# Altium PCB Hexrotor Joint Splitter.PcbDoc
Units mm, origin at the board's own origin, x right, y up, seen from the top; angles counter-clockwise.
Board outline 24.77 x 16.64 mm, 2 copper layers (Top Layer, Bottom Layer); 2 components, 5 nets, 19 pads, 2 vias.
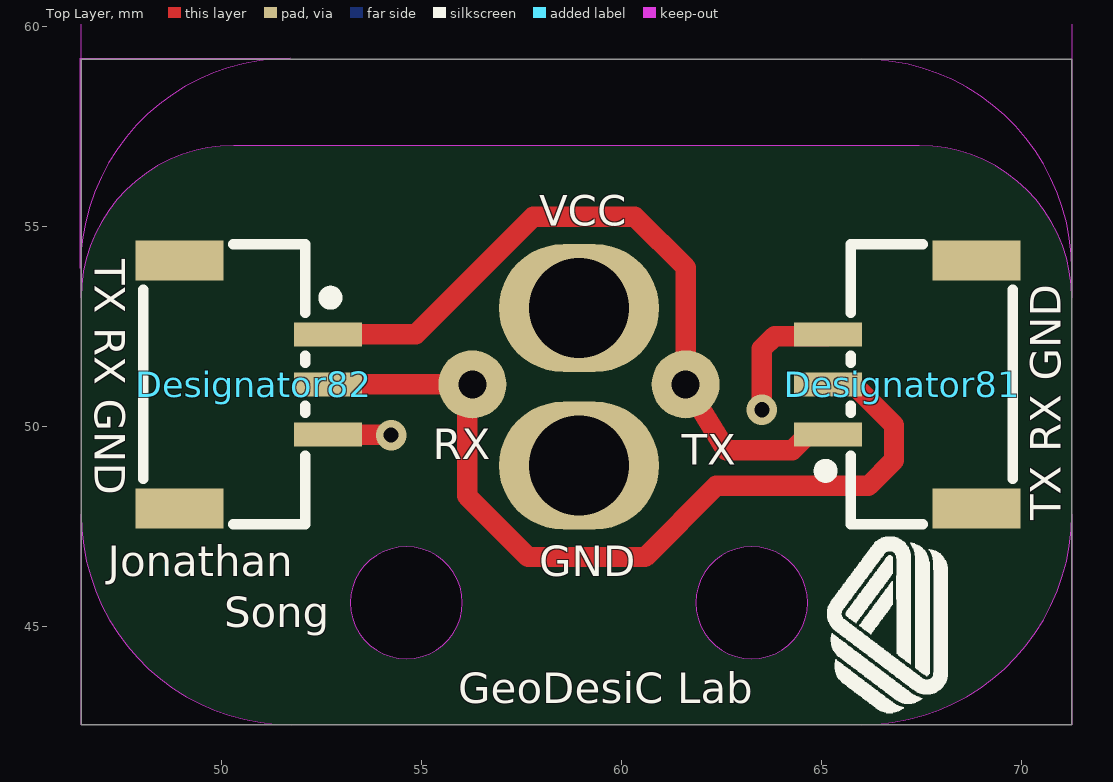
[diagram p0: Top Layer view]
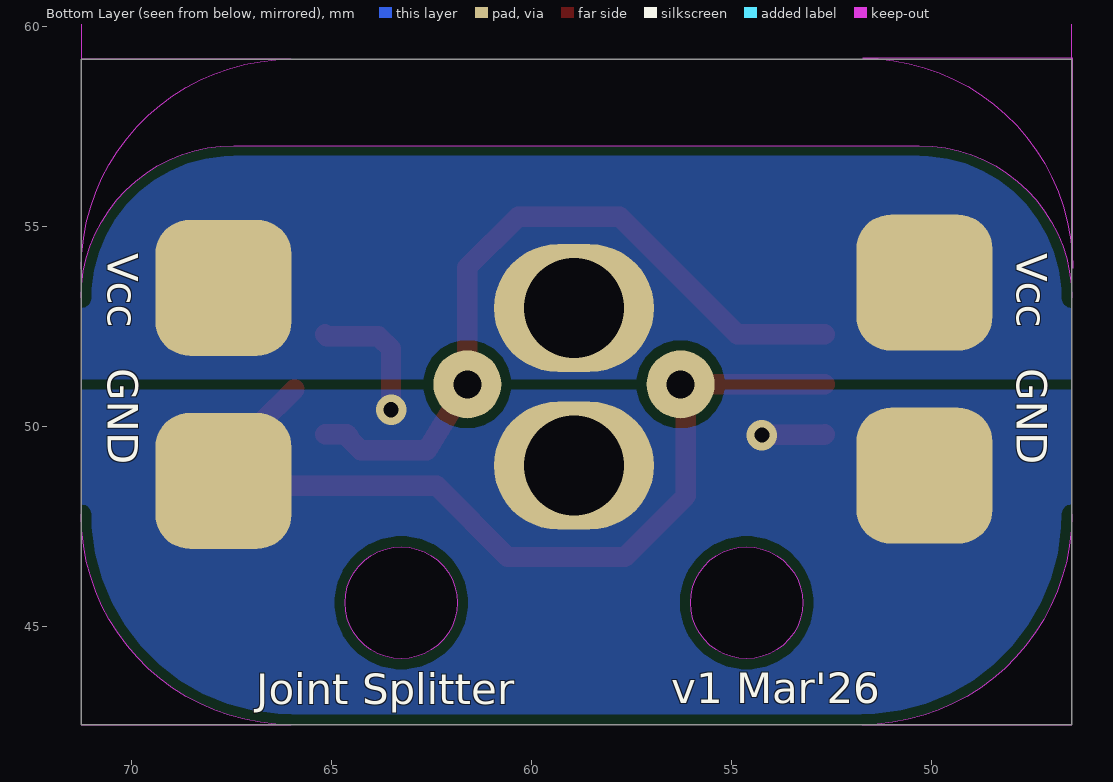
[diagram p1: Bottom Layer view, seen from below]

## Layer stack, top to bottom
Top Solder: solder mask 0.0102, Solder Resist, Dk 3.5
Top Layer: signal copper 0.0356
Dielectric 1: dielectric 0.32, FR-4, Dk 4.8
Bottom Layer: signal copper 0.0356
Bottom Solder: solder mask 0.0102, Solder Resist, Dk 3.5

## Board outline
46.482,42.545 71.247,42.545 71.247,59.182 46.482,59.182
cut-out: 46.482,53.213 46.482,60.452 71.247,60.452 71.247,53.213 ccw(c67.437,53.213) 67.437,57.023 50.292,57.023 ccw(c50.292,53.213)
cut-out: 65.993,59.182 71.247,59.182 71.247,53.928 ccw(c65.993,53.928)
cut-out: 46.459,53.951 46.459,59.205 51.713,59.205 ccw(c51.713,53.951)
cut-out: 61.846,45.593 ccw(c63.246,45.593) 63.246,44.193 ccw(c63.246,45.593) 64.646,45.593 ccw(c63.246,45.593) 63.246,46.993 ccw(c63.246,45.593)
cut-out: 53.21,45.593 ccw(c54.61,45.593) 54.61,44.193 ccw(c54.61,45.593) 56.01,45.593 ccw(c54.61,45.593) 54.61,46.993 ccw(c54.61,45.593)
cut-out: 71.247,47.799 71.247,42.545 65.993,42.545 ccw(c65.993,47.799)
cut-out: 51.736,42.545 46.482,42.545 46.482,47.799 ccw(c51.736,47.799)

## Design rules (kind name [scope] priority, off if disabled: settings)
Clearance [All] p1: gap=0.254 ignorepadtopadclearanceinfootprint=FALSE
PlaneConnect [All] p1: planeconnectstyle=Direct reliefexpansion=0.508 reliefentries=4 reliefconductorwidth=0.254 reliefairgap=0.254
PolygonConnect [All] p1: connectstyle=Direct reliefconductorwidth=0.254 reliefentries=4 polygonreliefangle="90 Angle" airgapwidth=0.254
RoutingVias [All] p1: holewidth=0.711 width=1.27 viastyle="Through Hole" minholewidth=0.711 minwidth=1.27 maxholewidth=0.711 maxwidth=1.27
SolderMaskExpansion [All] p1: expansion=0.102 istentingtop=FALSE
Width [All] p1: maxlimit=2.54 minlimit=0.152 preferedwidth=0.254
29 further rules are at their usual default settings.

## Components (designator, comment, footprint, x,y, rotation, side; value= is the part's Value field where it differs from the comment)
Designator81 "Comment" CONN-TH_SM03B-GHS-TB-LF-SN 67.005,51.054 r90 top
Designator82 "Comment" CONN-TH_SM03B-GHS-TB-LF-SN 50.8,51.054 r270 top

## Footprints (in the part's own frame and the unit in brackets; to place one, negate y for a bottom-side part, rotate by r counter-clockwise, add the part's x,y. Pads: shape width x height; smd on the part's side, far side on the other; paste and mask are expansions set on the pad)
CONN-TH_SM03B-GHS-TB-LF-SN [mm]
  rect 0.6x1.7 smd: 1(-1.25,1.854) 2(0,1.854) 3(1.25,1.854)
  rect 1x2.2 smd: 4(3.1,-1.854) 5(-3.1,-1.854)
  silkscreen extent -3.5,-2.77 3.5,2.06

## Free pads (board coordinates)
  round 1.524 smd: 4(863.219,0)
  oval 4x3.2 hole 2.5: 5(58.928,52.959) 6(58.928,49.022)
  round 1.7 hole 0.7: 7(61.595,51.054) 8(56.261,51.054)
  rrect50% 3.4x3.4 smd far side: 9(50.165,53.594) 9(67.691,53.467) 11(50.165,48.768) 11(67.691,48.641)

## Via types
v1: diameter 0.762, hole 0.381, Top Layer to Bottom Layer, 2 vias

## Nets (pads, with @x,y where several pads share a name; then routed paths per layer and width w, separated by ;. In a path a pad name is that pad's centre, name@x,y a point inside that pad or via, vN(x,y) a via of type N, cw(c..) or ccw(c..) an arc to the next point about the centre after c; other vN are vias at no path point)
AGND: 
GND: Designator81.3 Designator82.3 pad.6 pad.11 | length 5
  Top Layer w0.508: Designator82.3 52.664,49.794 54.219,49.794 v1(54.229,49.784) ; v1@63.5,50.488 v1(63.5,50.419) 63.5,51.943 63.815,52.258 65.105,52.258 Designator81.3
RX: Designator81.2 Designator82.2 pad.8 | length 20.9
  Top Layer w0.508: Designator82.2 55.194,51.054 pad.8 56.148,50.941 56.148,50.522 56.134,50.508 56.134,48.26 57.658,46.736 60.579,46.736 62.357,48.514 66.167,48.514 66.802,49.149 66.802,50.038 Designator81.2@65.913,50.927
TX: Designator81.1 Designator82.1 pad.7 | length 18.3
  Top Layer w0.508: Designator82.1 54.844,52.304 57.785,55.245 60.325,55.245 61.595,53.975 61.595,51.181 pad.7 62.611,49.403 64.257,49.403 64.555,49.701 64.555,49.758 64.601,49.804 Designator81.1
Vcc: pad.5 pad.9
pads on no net: Designator81.4 Designator81.5 Designator82.4 Designator82.5

## Polygon pours and split planes (outlines as drawn)
Vcc on Bottom Layer "NONET_L-01_P-001" (solid, pour order 0): 46.482,59.055 71.247,59.055 71.247,51.181 46.482,51.181
GND on Bottom Layer "NONET_L-01_P-001" (solid, pour order 2): 46.482,42.799 71.247,42.799 71.247,51.181 46.482,51.181

## Silkscreen, mask and mechanical layers (free items; w line width, h text height)
Top Overlay:
  drawing of 6 lines, arcs and shapes, not listed
  text "VCC" at 57.937,55.016 h0.76
  text "TX RX GND" at 46.824,54.186 h0.76 r270
  text "RX" at 55.27,49.174 h0.76
  text "TX" at 61.493,49.047 h0.76
  text "TX RX GND" at 70.968,47.65 h0.76 r90
  text "Jonathan" at 47.142,46.253 h0.76
  text "GND" at 57.937,46.253 h0.76
  text "Song" at 50.063,44.983 h0.76
  text "GeoDesiC Lab" at 55.905,43.078 h0.76
Bottom Overlay:
  text "Vcc   GND" at 47.854,54.331 h0.76 r90
  text "Vcc   GND" at 70.587,54.331 h0.76 r90
  text "v1 Mar'26" at 56.49,43.078 h0.76
  text "Joint Splitter" at 66.866,43.052 h0.76
Mechanical 1:
  circle w0.254: c63.246,45.593 r2.5
  circle w0.254: c63.246,45.593 r1.4
  circle w0.254: c58.928,51.054 r8
  circle w0.254: c54.61,45.593 r1.4
  circle w0.254: c54.61,45.593 r2.5
  circle w0.254: c58.928,51.054 r4
  lines w0.254: 58.928,51.054 58.928,59.055 ; 46.482,47.799 ccw(c51.736,47.799) 51.736,42.545 65.993,42.545 ccw(c65.993,47.799) 71.247,47.799 71.247,53.8 ccw(c65.993,53.8) 65.993,59.054 51.736,59.054 ccw(c51.736,53.8) 46.482,53.8 46.482,47.799 ; 46.482,53.213 cw(c50.292,53.213) 50.292,57.023 58.928,57.023 67.437,57.023 cw(c67.437,53.213) 71.247,53.213 71.247,55.499 71.247,60.452 46.482,60.452 46.482,56.261 46.482,53.213 ; 46.482,53.928 46.482,53.928